# Altium PCB UI-Board-PCB.pcbdoc
Units mil, origin at the board's own origin, x right, y up, seen from the top; angles counter-clockwise.
Board outline 3900 x 2000 mil, 2 copper layers (Top Layer, Bottom Layer), stack 62.2 mil thick; 21 components, 21 nets, 85 pads, 48 vias.
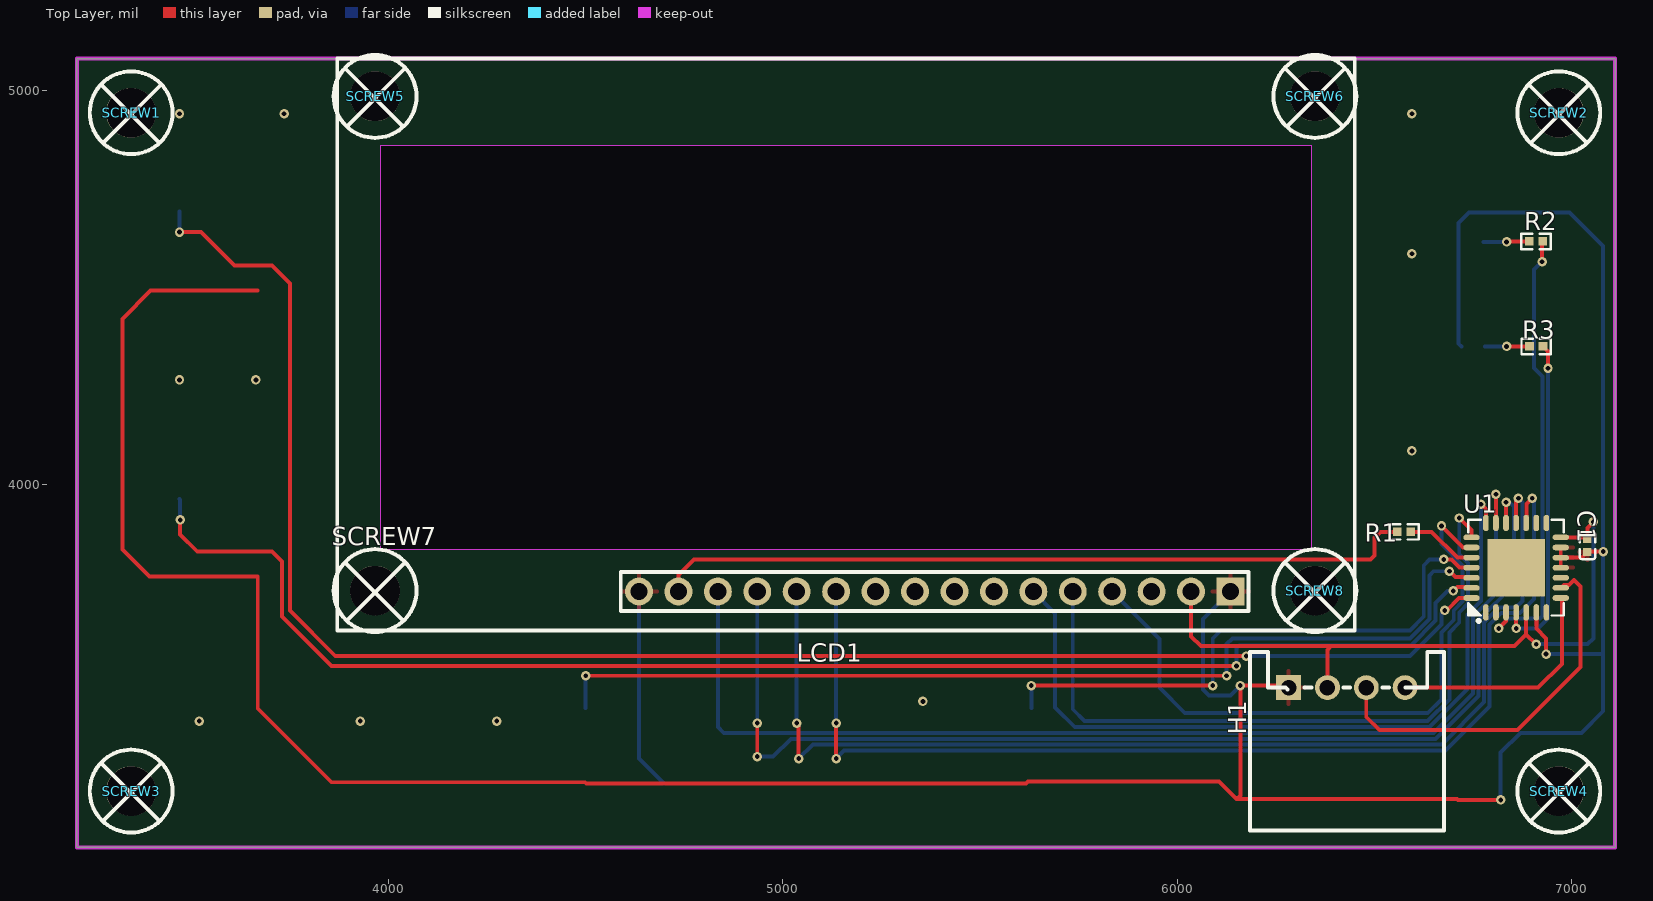
[diagram p0: Top Layer view]
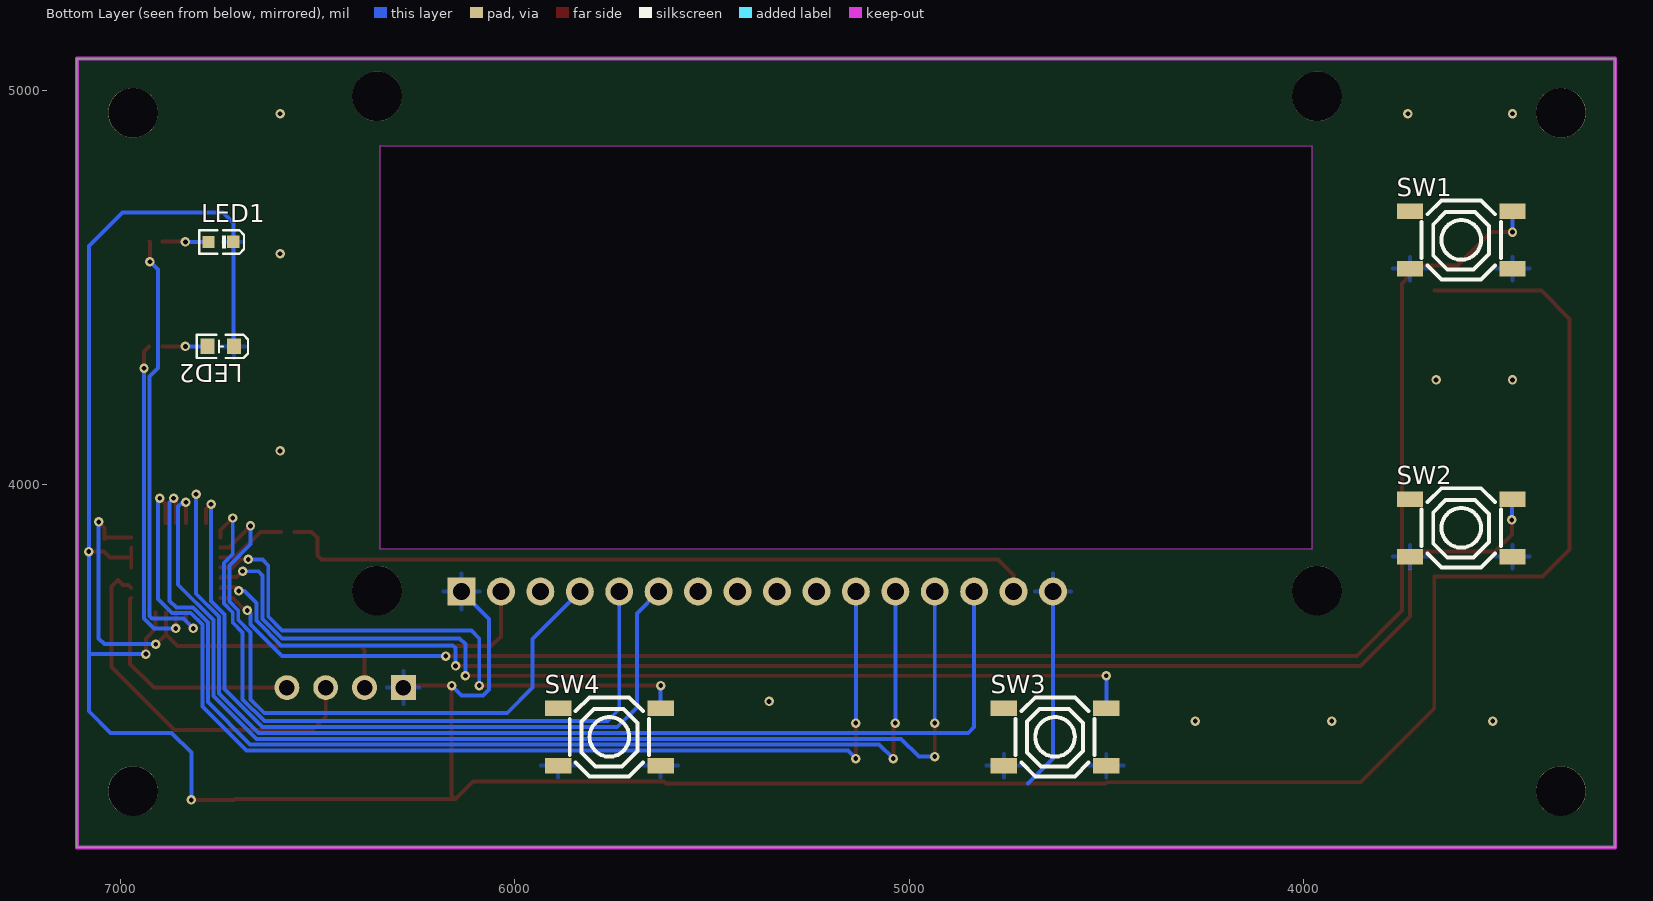
[diagram p1: Bottom Layer view, seen from below]

## Layer stack, top to bottom
Top Solder Mask Layer: solder mask 0.4, Dk 3.3
Top Layer: signal copper 1.4
Dielectric1: surface 59.4, FR4, Dk 4.5
Bottom Layer: signal copper 1.4
Bottom Solder Mask Layer: solder mask 0.4, Dk 3.3

## Board outline
3210,5080 3210,3080 7110,3080 7110,5080
cut-out: 3978.9,4859.5 3978.9,3835.9 6341.1,3835.9 6341.1,4859.5

## Design rules (kind name [scope] priority, off if disabled: settings)
BoardOutlineClearance copperThickness1oz [All] p0: genericclearance=10 ignorepadtopadclearanceinfootprint=FALSE except(0: Arc-SplitContinuation Track-SplitContinuation SMDPad-SplitContinuation THPad-SplitContinuation Via-SplitContinuation Fill-SplitContinuation Poly-SplitContinuation Region-SplitContinuation Text-SplitContinuation)
BoardOutlineClearance copperThickness2oz [All] p0: genericclearance=10 ignorepadtopadclearanceinfootprint=FALSE except(0: Arc-SplitContinuation Track-SplitContinuation SMDPad-SplitContinuation THPad-SplitContinuation Via-SplitContinuation Fill-SplitContinuation Poly-SplitContinuation Region-SplitContinuation Text-SplitContinuation)
BoardOutlineClearance Plane_innerPlane [All] p0: genericclearance=10 ignorepadtopadclearanceinfootprint=FALSE except(0: Arc-SplitContinuation Track-SplitContinuation SMDPad-SplitContinuation THPad-SplitContinuation Via-SplitContinuation Fill-SplitContinuation Poly-SplitContinuation Region-SplitContinuation Text-SplitContinuation)
BoardOutlineClearance Copper_copperRegion [All] p0: genericclearance=10 ignorepadtopadclearanceinfootprint=FALSE except(0: Arc-SplitContinuation Track-SplitContinuation SMDPad-SplitContinuation THPad-SplitContinuation Via-SplitContinuation Fill-SplitContinuation Poly-SplitContinuation Region-SplitContinuation Text-SplitContinuation)
BoardOutlineClearance otherClearance [All] p0: genericclearance=10 ignorepadtopadclearanceinfootprint=FALSE except(0: Arc-SplitContinuation Track-SplitContinuation SMDPad-SplitContinuation THPad-SplitContinuation Via-SplitContinuation Fill-SplitContinuation Poly-SplitContinuation Region-SplitContinuation Text-SplitContinuation)
Clearance copperThickness1oz [All] p1: gap=7 ignorepadtopadclearanceinfootprint=FALSE
Clearance copperThickness2oz [All] p1: gap=7 ignorepadtopadclearanceinfootprint=FALSE
Clearance Plane_innerPlane [All] p1: gap=7 ignorepadtopadclearanceinfootprint=FALSE
Clearance Copper_copperRegion [All] p1: gap=7 ignorepadtopadclearanceinfootprint=FALSE
Clearance otherClearance [All] p1: gap=7 ignorepadtopadclearanceinfootprint=FALSE
DiffPairsRouting differentialPair [All] p1: maxuncoupledlength=10 minlimit=6 maxlimit=Infinity mostfreqgap=6 toplayer_minwidth=5 toplayer_prefwidth=10 toplayer_maxwidth=100 bottomlayer_minwidth=5 bottomlayer_prefwidth=10 bottomlayer_maxwidth=100
PasteMaskExpansion pasteMaskExpansion [All] p1: expansion=0
PlaneConnect innerPlane [All] p1: planeconnectstyle=Relief reliefexpansion=20 reliefentries=4 reliefconductorwidth=10 reliefairgap=10
PolygonConnect copperRegion [All] p1: connectstyle=Relief reliefentries=4 reliefconductorwidth=10 polygonreliefangle="90 Angle" airgapwidth=10
RoutingVias viaSize [All] p1: viastyle="Through Hole" holewidth=12.0078 minholewidth=11.811 maxholewidth=248.0314 width=12.0078 minwidth=11.811 maxwidth=248.0314
SolderMaskExpansion solderMaskExpansion [IsVia] p1: useseparateexpansions=TRUE expansion=-1000 expansionbottom=-1000
SolderMaskExpansion solderMaskExpansion [All] p2: useseparateexpansions=TRUE expansion=2 expansionbottom=2
Width copperThickness1oz [All] p1: maxlimit=100 minlimit=5 preferedwidth=10
Width copperThickness2oz [All] p1: maxlimit=100 minlimit=8 preferedwidth=10

## Components (designator, comment, footprint, x,y, rotation, side; value= is the part's Value field where it differs from the comment)
C1 "100nF" C0402 7040,3845 r270 top
H1 "S4B-XH-A(LF)(SN)" CONN-TH_S4B-XH-A-LF-SN 6430,3485 r180 top
LCD1 "ZX-PZ2.54-1-16PZZ" HDR-TH_16P-P2.54-V-M-2 5385,3728.4 r180 top
LED1 "PSC-1608U52GC-G4" LED0603-RD_GREEN 6745,4615 r0 bottom
LED2 "GL0603UR01" LED0603-FD 6745,4350 r180 bottom
R1 "22Ω" R0402#1 6575,3880 r180 top
R2 "200Ω" R0402#2 6909.7,4616.4 r180 top
R3 "200Ω" R0402#1 6910,4350 r180 top
SCREW1 "" Screw-Hole-M3 3350,4940 r0 top locked
SCREW2 "" Screw-Hole-M3 6970,4940 r0 top locked
SCREW3 "" Screw-Hole-M3 3350,3220 r0 top locked
SCREW4 "" Screw-Hole-M3 6970,3220 r0 top locked
SCREW5 "" Screw-Hole-M3 3968.4,4981.6 r0 top locked
SCREW6 "" Screw-Hole-M3 6351.6,4981.6 r0 top locked
SCREW7 "" Screw-Hole-M3 3968.4,3728.4 r0 top locked
SCREW8 "" Screw-Hole-M3 6351.6,3728.4 r0 top locked
SW1 "TS-1187A-C-F-B" SW-SMD_4P-L5.1-W5.1-P3.70-LS6.5-TL_H3.0 3600,4620 r180 bottom
SW2 "TS-1187A-C-F-B" SW-SMD_4P-L5.1-W5.1-P3.70-LS6.5-TL_H3.0 3600,3890 r180 bottom
SW3 "TS-1187A-C-F-B" SW-SMD_4P-L5.1-W5.1-P3.70-LS6.5-TL_H3.0 4630,3360 r180 bottom
SW4 "TS-1187A-C-F-B" SW-SMD_4P-L5.1-W5.1-P3.70-LS6.5-TL_H3.0 5760,3360 r180 bottom
U1 "MCP23017T-E/ML" QFN-28_L6.0-W6.0-P0.65-BL-EP3.7 6859.2,3789 r0 top

## Footprints (in the part's own frame and the unit in brackets; to place one, negate y for a bottom-side part, rotate by r counter-clockwise, add the part's x,y. Pads: shape width x height; smd on the part's side, far side on the other; paste and mask are expansions set on the pad)
C0402 [mil]
  rect 19.7x21.3 smd: 1(-16.5,0) 2(16.5,0)
  silkscreen extent -34,-20 34,20
CONN-TH_S4B-XH-A-LF-SN [mil]
  rect 63x63 hole 39.4: 1(147.6,0)
  round 63 hole 39.4: 2(49.2,0) 3(-49.2,0) 4(-147.6,0)
  silkscreen extent -246,-91 246,362
HDR-TH_16P-P2.54-V-M-2 [mil]
  rect 70.9x70.9 hole 43.3: 1(-750,0)
  round 70.9 hole 43.3: 2(-650,0) 3(-550,0) 4(-450,0) 5(-350,0) 6(-250,0) 7(-150,0) 8(-50,0) 9(50,0) 10(150,0) 11(250,0) 12(350,0) 13(450,0) 14(550,0) 15(650,0) 16(750,0)
  silkscreen extent -796,-49 796,49
LED0603-FD [mil]
  rect 35.4x39.4 smd: 1(-33.5,0) 2(33.5,0)
  silkscreen extent -61,-30 69,30
LED0603-RD_GREEN [mil]
  rect 31.5x31.5 smd: 1(-31.5,-0.1) 2(31.5,0.1)
  silkscreen extent -59,-29 55,30
QFN-28_L6.0-W6.0-P0.65-BL-EP3.7 [mil]
  oval 14.3x41.5 smd paste-3937 mask+2: 1(-76.8,-113.3) 2(-51.2,-113.3) 3(-25.6,-113.3) 4(0,-113.3) 5(25.5,-113.3) 6(51.1,-113.3) 7(76.7,-113.3) 15(76.7,113.3) 16(51.1,113.3) 17(25.5,113.3) 18(0,113.3) 19(-25.6,113.3) 20(-51.2,113.3) 21(-76.8,113.3)
  oval 41.5x14.3 smd paste-3937 mask+2: 8(113.2,-76.8) 9(113.2,-51.2) 10(113.2,-25.6) 11(113.2,0) 12(113.2,25.6) 13(113.2,51.2) 14(113.2,76.8) 22(-113.3,76.8) 23(-113.3,51.2) 24(-113.3,25.6) 25(-113.3,0) 26(-113.3,-25.6) 27(-113.3,-51.2) 28(-113.3,-76.8)
  rect 145.7x145.7 smd paste-3937 mask+2: 29(0,0)
  silkscreen extent -121,-139 121,121
R0402#1 [mil]
  rect 22.3x21.3 smd paste-3937 mask+2: 1(-17,0) 2(17,0)
  silkscreen extent -37,-20 37,20
R0402#2 [mil]
  rect 22.3x21.3 smd paste-3937 mask+2: 1(-17,0) 2(17.1,0)
  silkscreen extent -37,-20 37,20
Screw-Hole-M3 [mil]
  round 126 hole 126 paste+0 mask+4: 1(-2.5,2.5)
  silkscreen extent -108,-102 102,108
SW-SMD_4P-L5.1-W5.1-P3.70-LS6.5-TL_H3.0 [mil]
  rect 66.9x39.4 smd: 1(-129.9,72.8) 2(129.9,72.8) 3(-129.9,-72.8) 4(129.9,-72.8)
  silkscreen extent -100,-100 100,100

## Via types
v1: diameter 24, hole 12, Top Layer to Bottom Layer, 48 vias

## Nets (pads, with @x,y where several pads share a name; then routed paths per layer and width w, separated by ;. In a path a pad name is that pad's centre, name@x,y a point inside that pad or via, vN(x,y) a via of type N, cw(c..) or ccw(c..) an arc to the next point about the centre after c; other vN are vias at no path point)
$1N1411: LED1.2 R2.2 | length 116.7
  Top Layer w10: v1(6835,4614.9) 6836.6,4616.4 R2.2
  Bottom Layer w10: LED1.2 v1(6835,4614.9)
$1N1415: LED2.1 R3.2 | length 113.4
  Top Layer w10: v1(6835,4350) R3.2
  Bottom Layer w10: LED2.1@6779.6,4350 v1(6835,4350)
$1N4542: LCD1.15 R1.2 | length 1936.5
  Top Layer w10: LCD1.15 4735,3770 4775,3810 6490,3810 6500,3820 6500,3865 6515,3880 R1.2
BK-ON: R1.1 U1.24 | length 181
  Top Layer w10: R1.1 6644.8,3880 6710.2,3814.6 U1.24
DB4: LCD1.11 U1.17 | length 2808.9
  Top Layer w10: v1(5135,3305) v1(5135,3395) ; U1.17 6885,3902.5 6885,3950 v1(6900,3965)
  Bottom Layer w10: v1(5135,3305) 5155,3325 6680,3325 6792,3437 6792,3644.5 6821.5,3674 6869,3674 6905,3710 6905,3960 v1(6900,3965) ; v1(5135,3395) LCD1.11
DB5: LCD1.12 U1.18 | length 2873.9
  Top Layer w10: v1(5035,3395) 5040,3390 v1(5040,3305) ; U1.18 6859.2,3959.2 v1(6865,3965)
  Bottom Layer w10: v1(5035,3395) LCD1.12 ; v1(5040,3305) 5076,3341 6671,3341 6778,3448 6778,3650.3 6815.7,3688 6858,3688 6875,3705 6875,3955 v1(6865,3965)
DB6: LCD1.13 U1.19 | length 2905.5
  Top Layer w10: v1(4935,3310) v1(4935,3395) ; U1.19 v1(6833.6,3955)
  Bottom Layer w10: v1(4935,3310) 4975,3310 5020,3355 6655,3355 6764,3464 6764,3656.1 6853.6,3745.7 6853.6,3943.9 6842.5,3955 v1(6833.6,3955) ; v1(4935,3395) LCD1.13
DB7: LCD1.14 U1.20 | length 2907.8
  Top Layer w10: U1.20 v1(6808,3975)
  Bottom Layer w10: LCD1.14 4835,3385 4850,3370 6650,3370 6750,3470 6750,3665 6808,3723 v1(6808,3975)
DOWN-SW: SW2.2 U1.27 | length 3720.9
  Top Layer w10: v1(3471.6,3910) 3471.6,3873.4 3515,3830 3705,3830 3730,3805 3730,3665 3855,3540 v1(6150,3540) ; v1(6700,3730) 6710,3740 6743.7,3740 U1.27
  Bottom Layer w10: SW2.2 3471.6,3961.3 v1(3471.6,3910) ; v1(6150,3540) 6150,3585 6157.1,3592.1 6592.1,3592.1 6655,3655 6655,3700 6685,3730 v1(6700,3730)
E: LCD1.6 U1.21 | length 1958.6
  Top Layer w10: v1(6770,3950) 6782.4,3937.6 U1.21
  Bottom Layer w10: LCD1.6 5690,3673.4 5690,3435 5740,3385 6640,3385 6735.9,3480.9 6735.9,3670.8 6770,3704.8 v1(6770,3950)
ENTER-SW: SW3.2 U1.26 | length 2556
  Top Layer w10: v1(4500,3515) v1(6125,3515) ; v1(6690,3780) 6705,3765 6744.3,3765 U1.26
  Bottom Layer w10: v1(4500,3515) 4500,3432.9 SW3.2 ; v1(6125,3515) 6125,3595 6140,3610 6589.8,3610 6639,3659.2 6639,3769 6650,3780 v1(6690,3780)
ERR-LED: R3.1 U1.4 | length 827.2
  Top Layer w10: v1(6859.2,3635) U1.4 ; R3.1 6940,4337 v1(6940,4295)
  Bottom Layer w10: v1(6859.2,3635) 6915,3635 6940,3660 v1(6940,4295)
GND: C1.2 H1.1 LCD1.1 LCD1.16 LED1.1 LED2.2 SW1.3 SW1.4 SW2.3 SW2.4 SW3.3 SW3.4 SW4.3 SW4.4 U1.6 U1.11 U1.12 U1.13 | length 8996.5
  Top Layer w10: 3668.4,4491.6 3396.6,4491.6 3325,4420 3325,3835 3393.4,3766.6 3668.4,3766.6 3668.4,3431.6 3855,3245 4498.1,3245 4501.6,3241.6 5616.6,3241.6 5621.6,3246.6 6106.1,3246.6 6150.5,3202.2 ; H1.1@6282.4,3477.8 6270.2,3490 v1(6160,3490) 6160,3211.7 6150.5,3202.2 ; v1(6820,3200) 6711.7,3200 6709.5,3202.2 6150.5,3202.2 ; U1.6 6910.3,3634.7 6935,3610 v1(6935,3570) ; U1.11 U1.12 ; U1.13 U1.12 ; v1(7080,3830) 7041.5,3830 C1.2 7026.1,3814.6 U1.12
  Bottom Layer w10: LCD1.16 4635,3305 4698.4,3241.6 ; LCD1.1 6065,3658.4 6065,3480 6080,3465 6135,3465 v1(6160,3490) ; LED2.2@6720.4,4350 6713.5,4356.9 LED1.1 6713.5,4663.5 6740,4690 6995,4690 7080,4605 v1(7080,3830) 7080,3570.5 ; v1(6820,3200) 6820,3320 6870,3370 7025,3370 7080,3425 7080,3570.5 ; v1(6935,3570) 7079.5,3570 7080,3570.5
  other v1: 3520,3400 3928.3,3400 4274.3,3400 5355,3450 6595,4085 3470,4265 3663.7,4265 6595,4585 3470,4940 3735.2,4940 6595,4940
MENU-SW: SW4.2 U1.25 | length 1460.8
  Top Layer w10: v1(5630,3490) v1(6090,3490) ; v1(6676,3810) 6695,3810 6716,3789 U1.25
  Bottom Layer w10: v1(5630,3490) 5630.1,3489.9 SW4.2 ; v1(6090,3490) 6090,3610 6110,3630 6590,3630 6625,3665 6625,3795 6640,3810 v1(6676,3810)
R/W: LCD1.5 U1.22 | length 1839.8
  Top Layer w10: v1(6715,3915) 6745.9,3884.1 U1.22
  Bottom Layer w10: LCD1.5 5735,3430 5765,3400 6635,3400 6690,3455 6690,3625 6715,3650 6715,3675 6737.7,3697.7 6737.7,3800.6 6715,3823.3 v1(6715,3915)
RS: LCD1.4 U1.23 | length 1632.6
  Top Layer w10: v1(6670,3895) 6724.8,3840.2 U1.23
  Bottom Layer w10: LCD1.4 5955,3608.4 5955,3485 6020,3420 6635,3420 6670,3455 6670,3625.2 6701,3656.2 6701,3681 6723.7,3703.7 6723.7,3794.8 6670,3848.5 v1(6670,3895)
SCL: H1.4 U1.8 | length 593.5
  Top Layer w10: H1.4@6577.6,3477.8 6584.8,3485 6915,3485 6975,3545 6975,3709.7 U1.8
SDA: H1.3 U1.9 | length 960.2
  Top Layer w10: H1.3@6479.2,3477.8 6479.2,3410.8 6512.8,3377.2 6862.8,3377.2 7022.8,3537.2 7022.8,3741.1 7006.4,3757.6 7005.9,3757.6 6993.6,3745.3 6979.9,3745.3 U1.9
SYS-LED: R2.1 U1.3 | length 1140.3
  Top Layer w10: v1(6815,3635) 6833.6,3653.6 U1.3 ; v1(6925,4565) 6925,4614.7 R2.1
  Bottom Layer w10: v1(6815,3635) 6840,3660 6920,3660 6926,3666 6926,4274 6905,4295 6905,4545 v1(6925,4565)
UP-SW: SW1.2 U1.28 | length 4337.4
  Top Layer w10: v1(3470,4640) 3525,4640 3610,4555 3705,4555 3750,4510 3750,3680 3865,3565 v1(6175,3565) ; v1(6678,3680.7) 6683.2,3680.7 6714.7,3712.2 U1.28
  Bottom Layer w10: v1(3470,4640) 3470.1,4640.1 SW1.2 ; v1(6175,3565) 6590,3565 6670,3645 6670,3672.7 v1(6678,3680.7)
VCC: C1.1 H1.2 LCD1.2 U1.5 U1.14 | length 1758.6
  Top Layer w10: LCD1.2 6035,3615 6060,3590 6390,3590 ; H1.2@6380.8,3477.8 6380.8,3580.8 6390,3590 ; U1.5 6884.7,3619.7 ; v1(6910,3595) 6909.5,3595 6884.7,3619.7 ; U1.14 7035.8,3865.8 C1.1 7040,3890 v1(7055,3905) ; 6390,3590 6855,3590 6884.7,3619.7
  Bottom Layer w10: v1(6910,3595) 7040,3595 7055,3610 v1(7055,3905)
pads on no net: LCD1.3 LCD1.7 LCD1.8 LCD1.9 LCD1.10 SCREW1.1 SCREW2.1 SCREW3.1 SCREW4.1 SCREW5.1 SCREW6.1 SCREW7.1 SCREW8.1 SW1.1 SW2.1 SW3.1 SW4.1 U1.1 U1.2 U1.7 U1.10 U1.15 U1.16 U1.29

## Polygon pours and split planes (outlines as drawn)
GND on Top Layer (solid, remove dead copper, pour order 0): 3140,5120 3140,3030 7150,3030 7150,5120
GND on Bottom Layer (solid, remove dead copper, pour order 2): 3000,5165 3000,3000 7150,3000 7150,5165

## Keep-outs
Board Outline Layer:
  region: 3978.9,4859.5 3978.9,3835.9 6341.1,3835.9 6341.1,4859.5
  region: 3978.9,4859.5 3978.9,3835.9 6341.1,3835.9 6341.1,4859.5
  lines w0.1: 3978.9,3835.9 3978.9,4859.5 6341.1,4859.5 6341.1,3835.9 3978.9,3835.9
  lines w10: 3210,3080 3210,5080 7110,5080 7110,3080 3210,3080

## Silkscreen, mask and mechanical layers (free items; w line width, h text height)
Top Silkscreen Layer:
  lines w10: 3870,3630 3870,5080 6450,5080 6450,3630 3870,3630
Mechanical Layer:
  lines w0.1: 3978.9,3835.9 3978.9,4859.5 6341.1,4859.5 6341.1,3835.9 3978.9,3835.9